# Altium PCB Motor_0307.PcbDoc
Units mm, origin at the board's own origin, x right, y up, seen from the top; angles counter-clockwise.
Board outline 39.63 x 29.63 mm, 2 copper layers (Top Layer, Bottom Layer); 1 components, 46 nets, 10 pads, 0 vias.
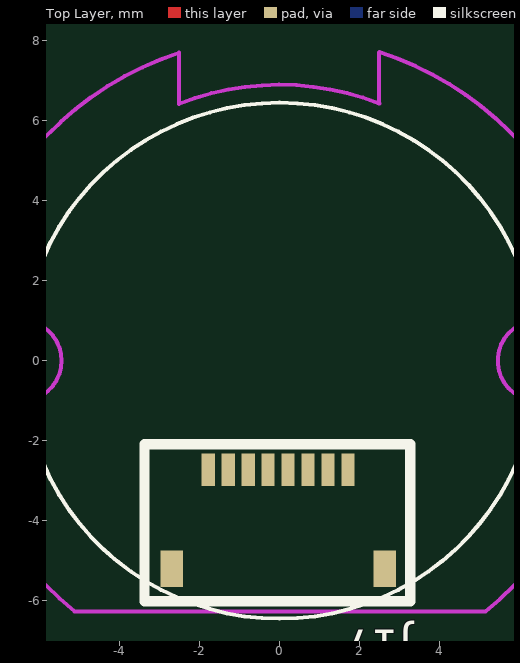
[diagram p0: Top Layer view]
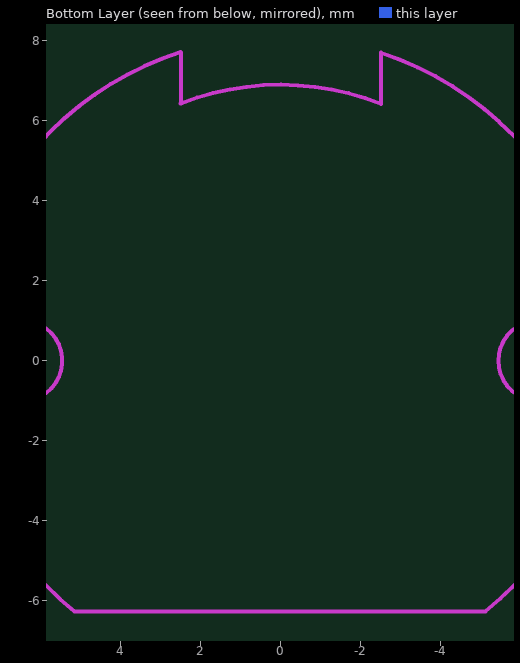
[diagram p1: Bottom Layer view, seen from below]

## Layer stack, top to bottom
Top Layer: signal copper 0.0356
Dielectric: dielectric 0.32, FR-4, Dk 4.8
Bottom Layer: signal copper 0.0356

## Board outline
-21.12,-14.354 ccw(c-21.057,-14.354) -21.057,-14.417 18.443,-14.417 ccw(c18.443,-14.354) 18.507,-14.354 18.507,15.146 ccw(c18.443,15.146) 18.443,15.21 -21.057,15.21 ccw(c-21.057,15.146) -21.12,15.146

## Design rules (kind name [scope] priority, off if disabled: settings)
Clearance Clearance_2 [(InPoly)] p1: gap=0.205
Clearance [All] p2: gap=0.127
ComponentClearance [All] p1 off: gap=0.254 collisioncheckmode=3 verticalgap=0.254 showdistances=FALSE
HoleSize [All] p1: absolutevalues=TRUE maxlimit=5.08 minlimit=0.025 maxpercent=80.000 minpercent=20.000
HoleToHoleClearance [All] p1: gap=0.127 allowstackedmicrovias=TRUE
MinimumSolderMaskSliver [All] p1 off: minsoldermaskwidth=0.127
PlaneClearance [All] p1: clearance=0.178
PolygonConnect PolygonConnect_1 [IsPad] p1: connectstyle=Relief reliefconductorwidth=0.508 reliefentries=4 polygonreliefangle="90 Angle"
PolygonConnect [All] p2: connectstyle=Direct reliefconductorwidth=0.508 reliefentries=4 polygonreliefangle="90 Angle"
RoutingVias [All] p1: holewidth=0.457 width=0.762 viastyle="Through Hole" minholewidth=0.3 minwidth=0.5 maxholewidth=1 maxwidth=2
SilkToSilkClearance [All] p1 off: silktosilkclearance=0.127
SilkscreenOverComponentPads [All] p1 off: minsilkscreentomaskgap=0.127
SolderMaskExpansion [All] p1: expansion=0.102
TestPointUsage FabricationTestPointUsage [All] p1: valid=0 allowmultiple=FALSE
Testpoint FabricationTestpoint [(IsPad And (OnTopLayer Or OnBottomLayer))] p1: side=3 testpointundercomponent=TRUE minsize=1.016 maxsize=2.54 preferedsize=1.524 minholesize=0 maxholesize=1.016 preferedholesize=0.813 testpointgrid=0.025 style=297 order=0123456789
Width [All] p1: maxlimit=2.54 minlimit=0.127 preferedwidth=0.203
17 further rules are at their usual default settings.

## Components (designator, comment, footprint, x,y, rotation, side; value= is the part's Value field where it differs from the comment)
J17 "2.54-4P" 0.5-8P -0.036,-3.96 r180 top

## Footprints (in the part's own frame and the unit in brackets; to place one, negate y for a bottom-side part, rotate by r counter-clockwise, add the part's x,y. Pads: shape width x height; smd on the part's side, far side on the other; paste and mask are expansions set on the pad)
0.5-8P [mil]
  rect 22x36 smd: 0(104.82,48.75) 0/2(-104.82,48.75)
  rect 13x32 smd: 1(68.98,-48.75) 2(49.29,-48.75) 3(29.61,-48.75) 4(9.92,-48.75) 5(-9.76,-48.75) 6(-29.45,-48.75) 7(-49.13,-48.75) 8(-68.82,-48.75)
  silkscreen extent -130,-74 131,81

## Nets (pads, with @x,y where several pads share a name; then routed paths per layer and width w, separated by ;. In a path a pad name is that pad's centre, name@x,y a point inside that pad or via, vN(x,y) a via of type N, cw(c..) or ccw(c..) an arc to the next point about the centre after c; other vN are vias at no path point)
5V: 
+15V: 
AD_SP: 
GND: 
HO1: 
HO2: 
HO3: 
LO1: 
LO2: 
LO3: 
NetC13_1: 
NetC14_1: 
NetC15_1: 
NetD2_1: 
NetQ1_6: 
NetQ1_8: 
NetQ2_6: 
NetQ2_8: 
NetQ3_6: 
NetQ3_8: 
NetR33_2: 
NetR35_2: 
NRST: 
OC: 
OPA0_IN: 
OPA0_IP: 
OPA1_IN: 
OPA1_IP: 
PGND: 
PU: 
PV: 
PW: 
PWM: 
RXD0: 
SWCLK: 
SWDIO: 
TXD0: 
UX: 
VB1: 
VB2: 
VB3: 
VBUS: 
VCC24: 
VDD5V: 
VS2: 
VS3: 
pads on no net: J17.0 J17.0/2 J17.1 J17.2 J17.3 J17.4 J17.5 J17.6 J17.7 J17.8

## Keep-outs
Keep-Out Layer:
  circle w0.1: c-6.469,1.956 r0.5
  circle w0.1: c6.434,-1.981 r0.5
  circle w0.1: c6.45,0 r1
  circle w0.1: c-6.45,0 r1
  lines w0.1: -5.124,-6.274 cw(c0,0) -2.512,7.701 -2.512,6.422 ; -5.124,-6.27 5.141,-6.27 ; -2.512,6.426 cw(c0,0) 2.492,6.434 ; 2.489,6.434 2.489,7.701 ; 2.494,7.715 cw(c0.025,0) 5.149,-6.274

## Silkscreen, mask and mechanical layers (free items; w line width, h text height)
Top Overlay:
  circle w0.1: c0,0 r6.45
  lines w0.1: -6.775,-0.025 cw(c-0.025,-0.025) -6.477,1.959 ; 6.426,-1.985 ccw(c-0.025,0) 6.725,0
Mechanical 15:
  lines w0.1: -11.125,0 11.1,0